# EAGLE board base (EAGLE 9.5.1)

Size 70 x 157.91 mm. Coordinates in mm from the lower left corner, seen from the top.
Outline: 57.58,20.2 arc90 57.6,20.23 57.6,95.33 arc25 57.31,96.61 54.27,103.08 arc65 51.56,104.8 18.5,104.81 arc65 15.69,103.07 12.68,96.6 arc25 12.4,95.34 12.4,34.4 9.45,34.4 arc90 8.45,33.4 8.45,21.4 arc90 9.45,20.4 12.12,20.4 12.4,20.22 arc22 12.62,19.66 15.74,11.88 arc68 18.53,10 19.8,10 arc-90 20.8,9 20.8,5 arc-90 15.8,0 7.5,0 arc-90 2.5,5 2.5,94.19 arc-40 4.16,97.39 11.84,106.61 arc40 13,109.81 13,139 arc90 8,144 3,144 arc-90 0,147 0,147.79 arc-80 4.15,152.72 33.29,157.76 arc-20 36.71,157.76 65.85,152.72 arc-80 70,147.79 70,147 arc-90 67,144 62,144 arc90 57,139 57,109.81 arc40 58.16,106.61 65.84,97.39 arc-40 67.5,94.19 67.5,5 arc-90 62.5,0 55.82,0 arc-90 50.82,5 50.82,9.35 arc-90 51.47,10 arc68 54.25,11.89 57.58,20.2
Outline: 23,139.24 47,139.24 arc-90 50,136.24 50,134.24 arc-90 47,131.24 23,131.24 arc-90 20,134.24 20,136.24 arc-90 23,139.24
Copper layers (1*16): Top 0.035mm / dielectric 1.5mm / Bottom 0.035mm
Design rules "default": minimum track width 6mil, minimum drill 0.35mm, track to track 6mil, track to pad 6mil, pad to pad 6mil, via to via 6mil, smd to smd 6mil, copper to edge 40mil, drill to drill 6mil, minimum pad ring 10mil, minimum via ring 8mil, stop-mask expansion 4mil, vias tented up to drill 0mil, thermal gap 10mil
Holes 2.8 mm at 6.15,92.71 10.5,7.95 6.15,44.4 59.5,7.95 59.5,65.95 63.85,44.4 10.5,65.95 63.85,92.71
Holes 3.2 mm at 64,79.81 6,79.91 34.27,110.39 34.27,115.47 34.27,120.55 29.18,110.39 29.18,115.47 29.18,120.55 24.11,110.39 24.11,115.47 24.11,120.55 19.02,110.39 19.02,115.47 19.02,120.55 49.51,110.39 49.51,115.47 49.51,120.55 44.42,110.39 44.42,115.47 44.42,120.55 39.34,110.39 39.34,115.47 39.34,120.55 34.27,125.63 29.18,125.63 24.11,125.63 19.02,125.63 49.51,125.63 44.42,125.63 39.34,125.63 34.27,143.41 29.18,143.41 24.11,143.41 19.02,143.41 49.51,143.41 44.42,143.41 39.34,143.41 34.27,148.49 29.18,148.49 24.11,148.49 19.02,148.49 49.51,148.49 44.42,148.49 39.34,148.49
Holes 3 mm at 10.5,3 59.5,3 10.5,148 59.5,148

## Placement (x,y rotation side)
E$1  [LOGO_FABO_MS]  7.06,28.44 90 top

## Library data of the parts
E$1 = FaBo-Logo

## Text on the board
tPlace: #1204 | Rev 1.0.4